# EAGLE board jduino_dualcore (EAGLE 5.06)
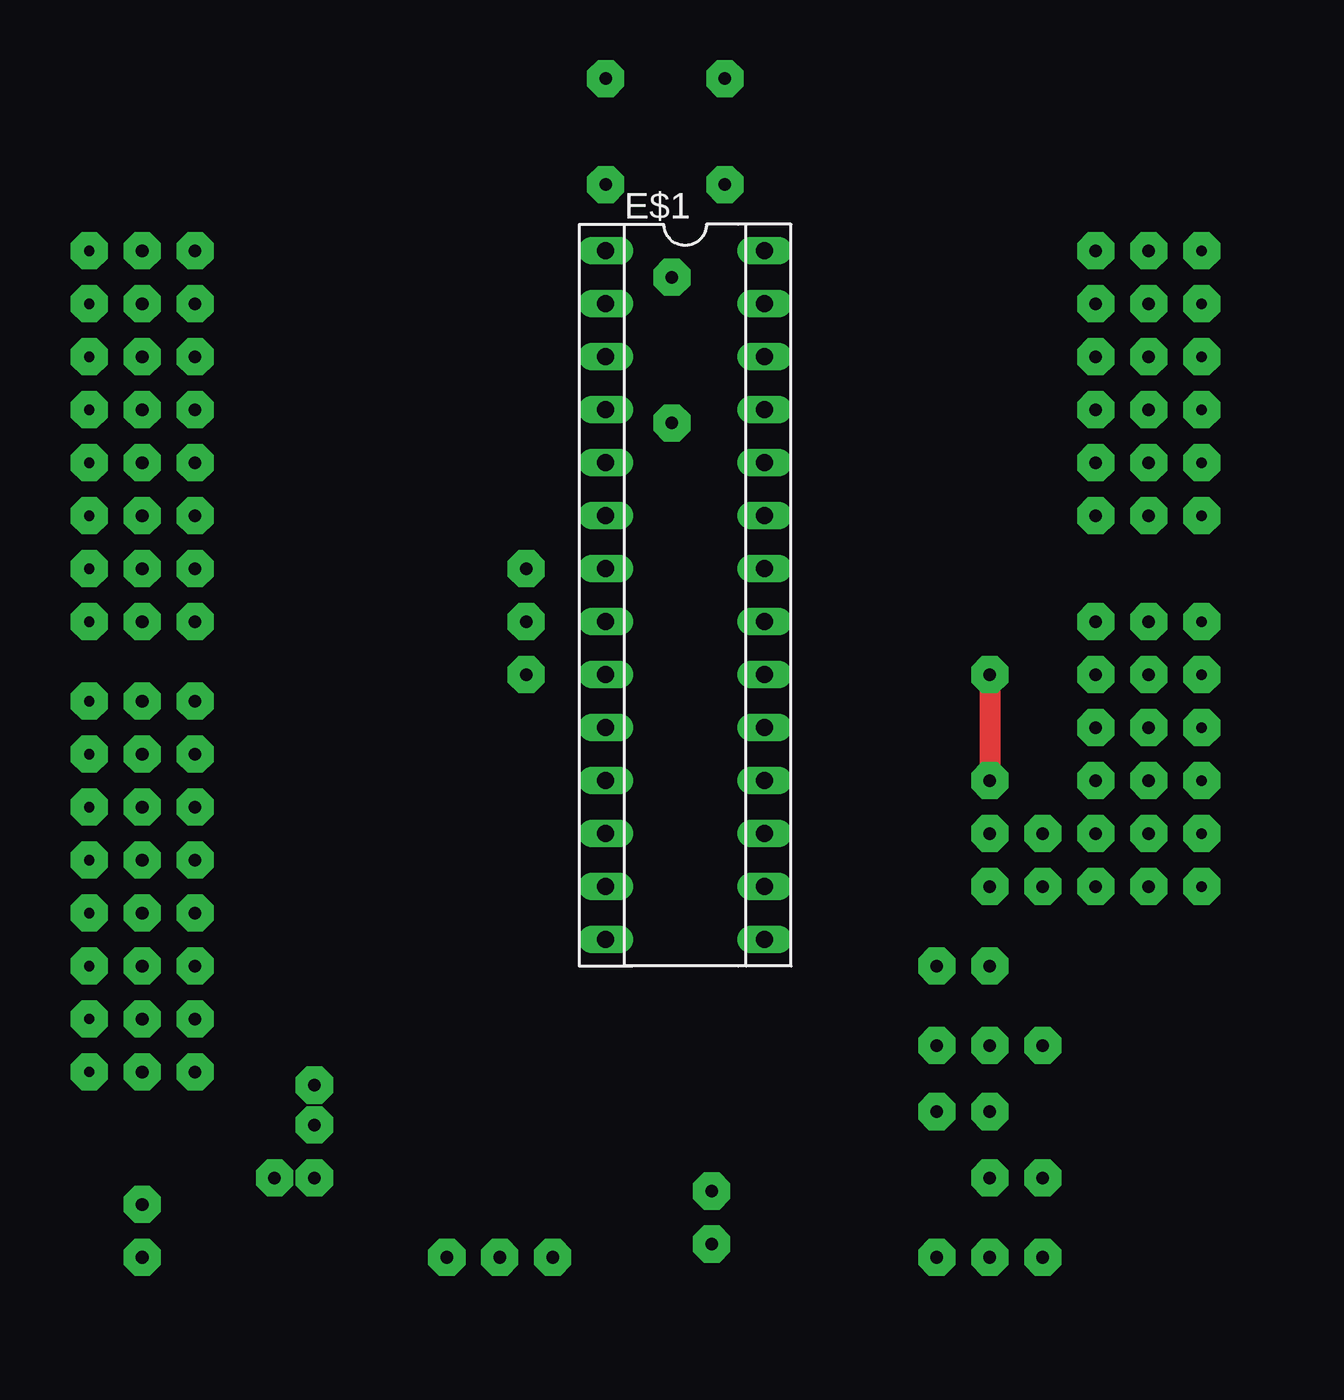
[diagram p0: board, top side]
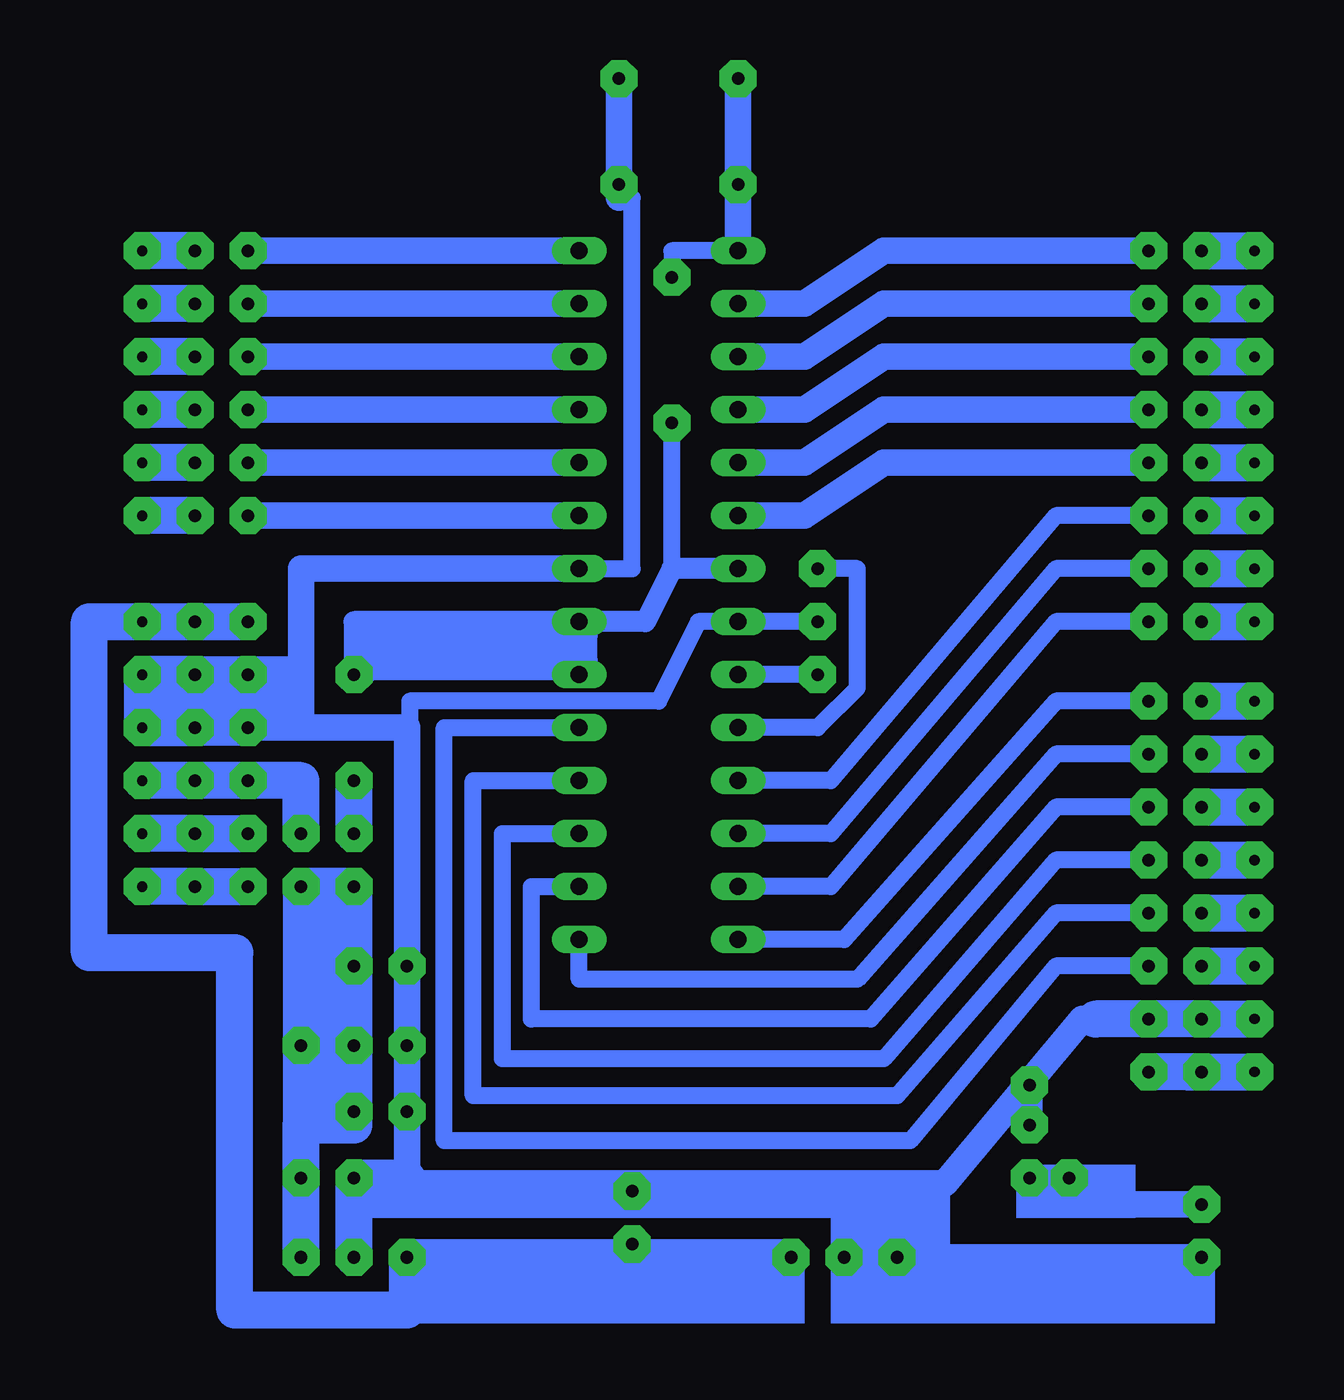
[diagram p1: board, bottom side, seen from below]

No outline drawn. Coordinates in mm, seen from the top.
Copper layers (1*16): Top 0.035mm / dielectric 1.5mm / Bottom 0.035mm
Design rules "default": minimum track width 10mil, minimum drill 24mil, track to track 8mil, track to pad 8mil, pad to pad 8mil, via to via 8mil, smd to smd 8mil, copper to edge 40mil, drill to drill 8mil, minimum pad ring 10mil, minimum via ring 8mil, stop-mask expansion 4mil, vias tented up to drill 0mil, thermal gap 10mil

## Footprints (pad centres in the part's own frame; a part is rotated, then mirrored left to right if it is on the bottom)
SOCKET-28-3 = drill 0.813 long: 1 -16.51,-3.81; 2 -13.97,-3.81; 3 -11.43,-3.81; 4 -8.89,-3.81; 5 -6.35,-3.81; 6 -3.81,-3.81; 7 -1.27,-3.81; 8 1.27,-3.81; 9 3.81,-3.81; 10 6.35,-3.81; 11 8.89,-3.81; 12 11.43,-3.81; 13 13.97,-3.81; 14 16.51,-3.81; 15 16.51,3.81; 16 13.97,3.81; 17 11.43,3.81; 18 8.89,3.81; 19 6.35,3.81; 20 3.81,3.81; 21 1.27,3.81; 22 -1.27,3.81; 23 -3.81,3.81; 24 -6.35,3.81; 25 -8.89,3.81; 26 -11.43,3.81; 27 -13.97,3.81; 28 -16.51,3.81

## Placement (x,y rotation side)
E$1  [SOCKET-28-3]  26.04,31.75 270 top

## Library data of the parts
E$1 = ic-package

## Nets
DP0: E$1.2
DP1: E$1.3
DP2: E$1.4
DP3: E$1.5
DP4: E$1.6
GND: E$1.22
S$1: E$1.11
S$2: E$1.12
S$3: E$1.13
S$4: E$1.14
S$7: E$1.15
S$8: E$1.28
S$9: E$1.25
S$10: E$1.26
S$11: E$1.27
S$12: E$1.24
S$13: E$1.23
S$16: E$1.8
S$20: E$1.1
S$29: E$1.16
S$30: E$1.17
S$31: E$1.18
S$32: E$1.19
VCC: E$1.7 E$1.20 E$1.21
XTAL1: E$1.9
XTAL2: E$1.10

## Tracks (layer width: path | path; a pad name or v marks a point on that pad's centre or on a via)
DP0  (via drill 0.6 pad 1.78)
  Bottom 1.27: E$1.2 19.05,45.72 15.24,48.26 v2.54,48.26
DP1  (via drill 0.6 pad 1.78)
  Bottom 1.27: E$1.3 19.05,43.18 15.24,45.72 v2.54,45.72
DP2  (via drill 0.6 pad 1.78)
  Bottom 1.27: E$1.4 19.05,40.64 15.24,43.18 v2.54,43.18
DP3  (via drill 0.6 pad 1.78)
  Bottom 1.27: E$1.5 19.05,38.1 15.24,40.64 v2.54,40.64
DP4  (via drill 0.6 pad 1.78)
  Bottom 1.27: E$1.6 19.05,35.56 15.24,38.1 v2.54,38.1
GND  (via drill 0.6 pad 1.78)
  Bottom 0.406: 27.3,50.8 27.94,50.8
  Bottom 0.813: 27.3,50.8 27.3,33.02 E$1.22
  Bottom 1.016: v0,11.43 v2.54,11.43
  Bottom 1.27: 27.94,50.8 v27.94,56.52 | E$1.22 43.18,33.02 43.18,25.4 | 43.18,25.4 38.1,25.4 v38.1,13.97 v38.1,10.16 v38.1,6.99 38.1,3.81 38.1,3.56 12.32,3.56 5.71,11.43 5.08,11.43 | 43.18,25.4 v45.72,25.4
  Bottom 1.778: v45.72,25.4 v48.26,25.4 | v45.72,25.4 v48.26,27.94 | v48.26,27.94 48.26,26.04 | v45.72,25.4 48.26,26.04 | v48.26,25.4 48.26,26.04 | v48.26,27.94 43.81,27.94 43.81,26.04 45.72,26.04 45.72,27.3 44.45,27.3 | 5.08,11.43 v2.54,11.43 v0,11.43 -2.54,11.43 | v48.26,27.94 50.8,27.94 50.8,25.4 v48.26,25.4 | v40.64,0 v40.64,3.81 38.1,3.81
S$1  (via drill 0.6 pad 1.78)
  Bottom 0.813: E$1.11 17.78,22.86 6.99,35.56 v2.54,35.56
S$2  (via drill 0.6 pad 1.78)
  Bottom 0.813: E$1.12 17.78,20.32 6.99,33.02 v2.54,33.02
S$3  (via drill 0.6 pad 1.78)
  Bottom 0.813: E$1.13 17.78,17.78 6.99,30.48 v2.54,30.48
S$4  (via drill 0.6 pad 1.78)
  Bottom 0.813: E$1.14 17.14,15.24 6.99,26.67 v2.54,26.67
S$5  (via drill 0.6 pad 1.78)
  other vias: 22.23,51.44
S$6  (via drill 0.6 pad 1.78)
  other vias: 27.94,51.44
S$7  (via drill 0.6 pad 1.78)
  Bottom 0.813: E$1.15 29.84,13.34 16.51,13.34 6.99,24.13 v2.54,24.13
S$8  (via drill 0.6 pad 1.78)
  Bottom 1.27: E$1.28 v45.72,48.26
S$9  (via drill 0.6 pad 1.78)
  Bottom 1.27: E$1.25 v45.72,40.64
S$10  (via drill 0.6 pad 1.78)
  Bottom 1.27: E$1.26 v45.72,43.18
S$11  (via drill 0.6 pad 1.78)
  Bottom 1.27: E$1.27 v45.72,45.72
S$12  (via drill 0.6 pad 1.78)
  Bottom 1.27: E$1.24 v45.72,38.1
S$13  (via drill 0.6 pad 1.78)
  Bottom 1.27: E$1.23 v45.72,35.56
S$14  (via drill 0.6 pad 1.78)
  Bottom 1.778: 50.8,22.86 v48.26,22.86 v45.72,22.86 43.18,22.86 v43.18,20.32
S$15  (via drill 0.6 pad 1.78)
  other vias: 45.72,27.94
S$16  (via drill 0.6 pad 1.78)
  Bottom 0.813: v18.41,30.48 E$1.8 24.13,30.48 26.04,26.67 37.97,26.67 38.1,4.19 38.1,4.06
S$17  (via drill 0.5 pad 1.78)
  other vias: -2.54,48.26
S$18  (via drill 0.6 pad 1.78)
  other vias: 27.3,0.64
S$20  (via drill 0.6 pad 1.78)
  Bottom 0.813: v25.4,46.99 25.4,48.26 E$1.1
  Bottom 1.27: E$1.1 v22.23,56.52
S$21  (via drill 0.6 pad 1.78)
  Bottom 1.778: 41.91,6.35 40.64,6.35 v40.64,6.99 v40.64,10.16 v40.64,13.97 v40.64,17.78 v43.18,17.78 v43.18,10.16 43.18,6.35 | v43.18,0 v43.18,3.81 43.18,6.35 | 43.18,6.35 41.91,6.35 | 41.91,6.35 41.91,17.14
S$22  (via drill 0.5 pad 1.78, 0.6 pad 1.78)
  Bottom 1.778: v19.68,0 v38.1,0 38.1,-2.54 46.35,-2.54 46.35,14.61 53.34,14.61 53.34,30.48 v50.8,30.48 v48.26,30.48 v45.72,30.48
S$23  (via drill 0.6 pad 1.78)
  Bottom 1.778: v0,48.26 -2.54,48.26
S$24  (via drill 0.6 pad 1.78)
  Bottom 1.778: v0,30.48 -2.54,30.48
S$25  (via drill 0.6 pad 1.78)
  Bottom 1.778: v0,26.67 -2.54,26.67
S$26  (via drill 0.6 pad 1.78)
  Bottom 1.778: v0,8.89 0.64,8.89 | 0.64,8.89 v2.54,8.89 | 0.64,8.89 -2.54,8.89
S$27  (via drill 0.6 pad 1.78)
  Bottom 1.778: v48.26,48.26 50.8,48.26
S$28  (via drill 0.6 pad 1.78)
  other vias: 27.3,3.17
S$29  (via drill 0.6 pad 1.78)
  Bottom 0.813: E$1.16 32.13,17.78 32.13,11.43 15.88,11.43 6.99,21.59 v2.54,21.59
S$30  (via drill 0.6 pad 1.78)
  Bottom 0.813: E$1.17 33.53,20.32 33.53,9.53 15.24,9.53 6.99,19.05 v2.54,19.05
S$31  (via drill 0.6 pad 1.78)
  Bottom 0.813: E$1.18 34.92,22.86 34.92,7.75 14.61,7.75 6.99,16.51 v2.54,16.51
S$32  (via drill 0.6 pad 1.78)
  Bottom 0.813: E$1.19 36.32,25.4 36.32,5.59 13.97,5.59 6.99,13.97 v2.54,13.97
S$33  (via drill 0.6 pad 1.78)
  Bottom 1.778: v48.26,35.56 50.8,35.56
S$34  (via drill 0.5 pad 1.78)
  other vias: -2.54,45.72
S$35  (via drill 0.6 pad 1.78)
  Bottom 1.778: v45.72,17.78 v48.26,17.78 50.8,17.78
S$36  (via drill 0.5 pad 1.78)
  other vias: -2.54,43.18
S$37  (via drill 0.6 pad 1.78)
  Bottom 1.778: v0,45.72 -2.54,45.72
S$38  (via drill 0.6 pad 1.78)
  Bottom 1.778: v0,43.18 -2.54,43.18
S$39  (via drill 0.6 pad 1.78)
  Bottom 1.778: v0,40.64 -2.54,40.64
S$40  (via drill 0.6 pad 1.78)
  Bottom 1.778: v0,38.1 -2.54,38.1
S$41  (via drill 0.6 pad 1.78)
  Bottom 1.778: v0,35.56 -2.54,35.56
S$42  (via drill 0.6 pad 1.78)
  Bottom 1.778: v0,33.02 -2.54,33.02
S$43  (via drill 0.6 pad 1.78)
  Bottom 1.778: v0,24.13 -2.54,24.13
S$44  (via drill 0.6 pad 1.78)
  Bottom 1.778: v0,21.59 -2.54,21.59
S$45  (via drill 0.6 pad 1.78)
  Bottom 1.778: v0,19.05 -2.54,19.05
S$46  (via drill 0.6 pad 1.78)
  Bottom 1.778: v0,16.51 -2.54,16.51
S$47  (via drill 0.6 pad 1.78)
  Bottom 1.778: v0,13.97 -2.54,13.97
S$48  (via drill 0.5 pad 1.78)
  other vias: -2.54,40.64
S$49  (via drill 0.5 pad 1.78)
  other vias: -2.54,38.1
S$50  (via drill 0.5 pad 1.78)
  other vias: -2.54,35.56
S$51  (via drill 0.5 pad 1.78)
  other vias: -2.54,33.02
S$52  (via drill 0.6 pad 1.78)
  Bottom 1.778: v45.72,20.32 v48.26,20.32 50.8,20.32
S$53  (via drill 0.6 pad 1.78)
  Bottom 1.778: v48.26,38.1 50.8,38.1
S$54  (via drill 0.6 pad 1.78)
  Bottom 1.778: v48.26,40.64 50.8,40.64
S$55  (via drill 0.6 pad 1.78)
  Bottom 1.778: v48.26,43.18 50.8,43.18
S$56  (via drill 0.6 pad 1.78)
  Bottom 1.778: v48.26,45.72 50.8,45.72
S$57  (via drill 0.5 pad 1.78)
  other vias: -2.54,30.48
S$58  (via drill 0.5 pad 1.78)
  other vias: 50.8,48.26
S$59  (via drill 0.5 pad 1.78)
  other vias: 50.8,45.72
S$60  (via drill 0.5 pad 1.78)
  other vias: 50.8,43.18
S$61  (via drill 0.5 pad 1.78)
  other vias: 50.8,40.64
S$62  (via drill 0.5 pad 1.78)
  other vias: 50.8,38.1
S$63  (via drill 0.5 pad 1.78)
  other vias: 50.8,35.56
S$64  (via drill 0.5 pad 1.78)
  other vias: 50.8,27.94
S$65  (via drill 0.5 pad 1.78)
  other vias: 50.8,25.4
S$66  (via drill 0.5 pad 1.78)
  other vias: 50.8,22.86
S$67  (via drill 0.5 pad 1.78)
  other vias: 50.8,20.32
S$68  (via drill 0.5 pad 1.78)
  other vias: 50.8,17.78
S$69  (via drill 0.5 pad 1.78)
  other vias: -2.54,26.67
S$70  (via drill 0.5 pad 1.78)
  other vias: -2.54,24.13
S$71  (via drill 0.5 pad 1.78)
  other vias: -2.54,21.59
S$72  (via drill 0.5 pad 1.78)
  other vias: -2.54,19.05
S$73  (via drill 0.5 pad 1.78)
  other vias: -2.54,16.51
S$74  (via drill 0.5 pad 1.78)
  other vias: -2.54,13.97
S$75  (via drill 0.5 pad 1.78)
  other vias: -2.54,11.43
S$76  (via drill 0.5 pad 1.78)
  other vias: -2.54,8.89
S$77  (via drill 0.6 pad 1.78)
  Bottom 1.27: v0,0 v14.61,0
  Bottom 1.778: v17.14,0 v14.61,0 14.61,3.17
S$78  (via drill 0.6 pad 1.78)
  Bottom 1.27: v0,2.54 3.81,2.54 3.81,3.81 v6.35,3.81 v8.26,3.81
S$79  (via drill 0.6 pad 1.78)
  Bottom 1.27: v8.26,8.26 v8.26,6.35
VCC  (via drill 0.6 pad 1.78)
  Top 1.016: v40.64,27.94 v40.64,22.86
  Bottom 0.813: E$1.21 29.84,29.84 | 29.84,28.57 E$1.20 | 25.4,33.02 v25.4,40.01
  Bottom 1.016: v40.64,27.94 40.64,30.48 E$1.21 26.67,30.48 25.4,33.02 E$1.7
  Bottom 1.778: v40.64,20.32 v40.64,22.86 | 29.84,28.57 29.84,29.84 39.37,29.84 39.37,28.57 | 39.37,28.57 30.48,28.57 | v40.64,27.94 40.01,28.57 39.37,28.57
XTAL1  (via drill 0.6 pad 1.78)
  Bottom 0.813: v18.41,27.94 E$1.9
XTAL2  (via drill 0.6 pad 1.78)
  Bottom 0.813: E$1.10 18.41,25.4 16.51,27.3 16.51,33.02 v18.41,33.02
(copper drawn outside any net)
  shapes: Bottom area x7